# Altium PCB zulu_a7.PcbDoc (part 2 of 3)
Units mm, origin at the board's own origin, x right, y up, seen from the top; angles counter-clockwise.
Board outline 69.85 x 25.4 mm, 6 copper layers (Top Layer, L2-GND, L3-SIG, L4-SIG, L5-VCC3V3, Bottom Layer), stack 1.65 mm thick; 178 components, 177 nets, 839 pads, 377 vias.
Unrouted connection lines stored in the file: 262.
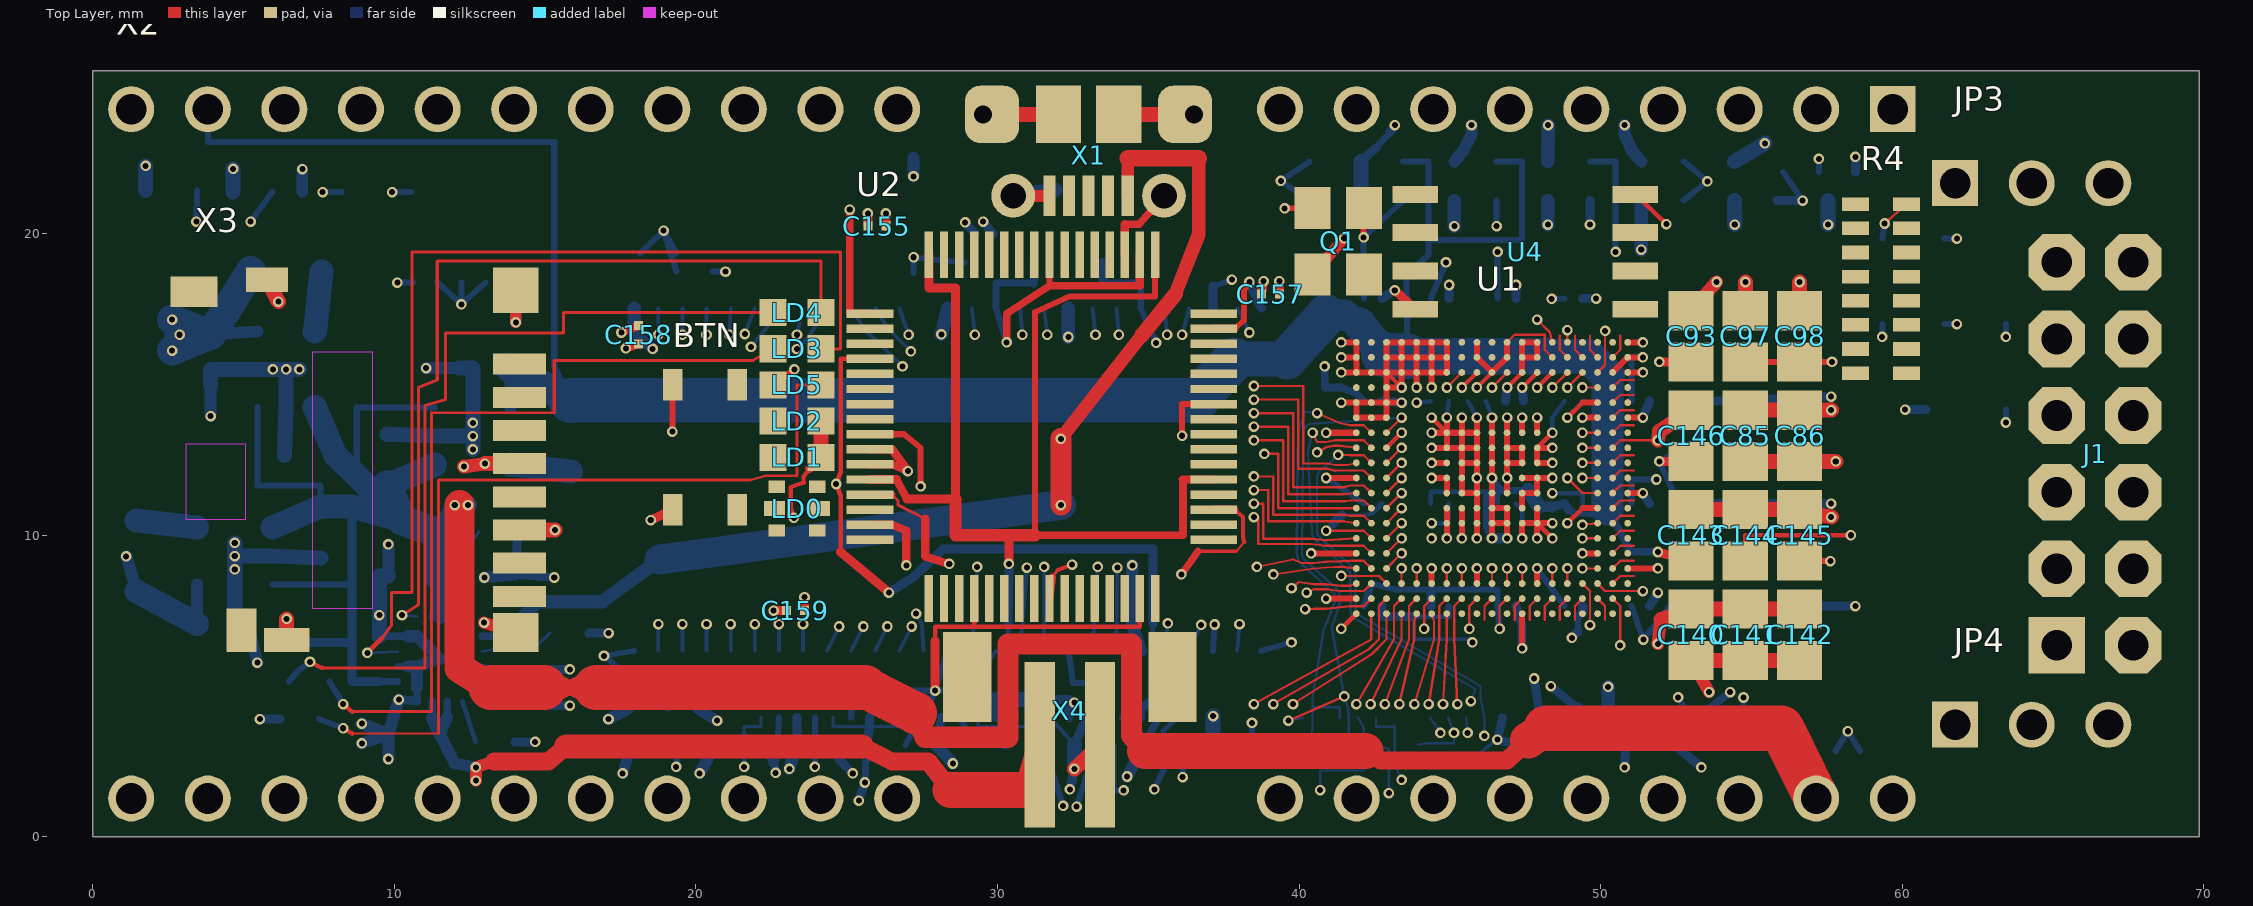
[diagram p0: Top Layer view]

## Part data (continued)
R18 R21 R78 R80 R81 R82 R83 R84 R85 R86 R102 R103 R104 R105 R106 R107 R108: library part R-US_SMALLR0402, "RESISTOR, Ame (continued)
  R81: MANF#=RC0402FR-07330RL, NOTE="RGB LED balance. The green and blue dice are 3.3 V-class parts on a 3.3 V rail, so the resistor never dominates their current -- that is structural and no resistor value fixes it. What the values CAN do is stop red swamping the other two. As built, and as Cmod A7 ships the same LED, 182/182/100 gave red 6.9 mA against green 1.9 and blue 1.5: red about four times either. At 330/33/33 it is red 3.8, green 2.9, blue 2.9. Worst case improves too, not just nominal -- green with a part 0.15 V high in Vf goes from 1.4 mA to 1.8. Lower resistors do make the current MORE sensitive in percentage terms, 77 percent of nominal retained at 100R against 61 at 33R, but the absolute floor is what you see and it rises. Currents read off the datasheet's own Vf/If curve at the working point, not off the 20 mA table.", SPEC="thick film +-1%, 1/16W, 0402"
  R83 R84: MANF#=RC0402FR-07330RL, SPEC="thick film +-1%, 1/16W, 0402"
  R85 R86: MANF#=RC0402FR-0710KL, SPEC="thick film +-1%, 1/16W, 0402"
  R102: MANF#=RC0402FR-073K57L, SPEC="thick film +-1%, 1/16W, 0402 -- ISET: 870 / 3.57k = 244 mA fast-charge current"
  R103: MANF#=RC0402FR-073K09L, SPEC="thick film +-1%, 1/16W, 0402 -- ILIM: 1530 / 3.09k = 495 mA input current limit (EN2 = VU, EN1 = GND select the resistor)"
  R104: MANF#=RC0402FR-0756K2L, SPEC="thick film +-1%, 1/16W, 0402 -- TMR: 10 x 56.2k x 48 s/k = 7.5 h fast-charge and 45 min precharge safety timers"
  R105: MANF#=RC0402FR-074K32L, SPEC="thick film +-1%, 1/16W, 0402 -- ITERM: 0.03 A x 4.32k / 3.57k = 36 mA termination (15 % of the charge current)"
  R106: MANF#=RC0402FR-0710KL, SPEC="thick film +-1%, 1/16W, 0402 -- TS: fixed 10k disables the pack-temperature check (2-pin pack, no NTC); the pack must carry its own protection"
  R107: MANF#=RC0402FR-071K5L, SPEC="thick film +-1%, 1/16W, 0402 -- PGOOD LED current: (4.4 - 2.1) / 1.5k = 1.5 mA"
  R108: MANF#=RC0402FR-071K5L, SPEC="thick film +-1%, 1/16W, 0402 -- CHG LED current: (4.4 - 2.0) / 1.5k = 1.6 mA"
R19 R20 R22 R23 R24 R25 R26 R27 R28 R29 R30 R31 R32 R33 R90 R91 R92 R93 R94 R96 R97 R98 R99 R101: library part R-US_SMALLR0201, "RESISTOR, American symbol, small 2-zigzag variant (sheet 2 only)", DeviceName=R0201, DeviceSetName=R-US_SMALL, GateName_1=G$1, LibraryName=rcl, MANF=Yageo, SPEC="thick film +-1%, 1/20W, 0201", SymbolName_1=R-US_SMALL
  R19 R90 R91 R92 R93 R94 R96 R97 R98: MANF#=RC0201FR-0710KL
  R20 R22 R23: MANF#=RC0201FR-071KL
  R24 R25: MANF#=RC0201FR-0733RL
  R26 R27 R28 R29 R30 R31 R32 R33: MANF#=RC0201FR-07200RL
  R99: MANF#=RC0201FR-074K7L
  R101: MANF#=RC0201FR-072K21L
R34: library part RES4742, "Resistor 4-pack   Package of four resistors.", DeviceName=742, DeviceSetName=RES4, DIGIKEY#=742C083???JPCT-ND, GateName_1=A, GateName_2=B, GateName_3=C, GateName_4=D, LibraryName=ctambe, MANF=CTS, MANF#=742C083472JP, MOUSER#=774-742C083???JP, NOTE="The microSD DAT0-3 pull-ups, all four elements used -- which is what an array is actually for. R1, R2 and R4 used 2, 3 and 6 of theirs in the EAGLE original and were split into discretes during the import; on 2026-09-09 R1 and R4 went back into arrays of their own (742C043472JP and 742C163101JP), so all three arrays on this board are CTS 74x concave parts sharing one land-pattern rule. R2 is still a discrete. 4.7k is the conventional value for SD data lines and it was already chosen; only the part number was missing. 5 percent is ample for a pull-up, so this is a J part where the discrete resistors on this board are F. CTS 742C is the family the footprint is named after. Confirm the suffix -- it encodes tolerance and packaging and is the easy thing to get wrong.", SPEC="4x4.7K isolated array 0603x4, 0.8 mm pitch; direct successor of the obsolete JTR", SymbolName_1=R1NV0, SymbolName_2=R1NV0, SymbolName_3=R1NV0, SymbolName_4=R1NV0
R35: library part R-US_R0402, "RESISTOR, American symbol", DeviceName=R0402, DeviceSetName=R-US_, GateName_1=G$1, LibraryName=rcl, MANF=Yageo, MANF#=RC0402FR-074K7L, SPEC="thick film +-1%, 1/16W, 0402", SymbolName_1=R-US
U1: library part XC7A35T-CPG236-1CPG236C, "Xilinx Artix-7 XC7A35T-1CPG236C   Replacement for the Spartan-6 XC6SLX25-FT256. See design notes: SDRAM/microSD/GPIO ball assignments verified against Digilent Cmod A7-35T (same device+package); config/JTAG/power ball assignments are functionally correct placeholders pending verification against the official Xilinx pinout file.", POWER=POWER, BANK216="BANK 216", DeviceName=-1CPG236C, DeviceSetName=XC7A35T-CPG236, GATE=SDRAM_A0, GateName_1=PWR, GateName_2=GND, GateName_3=BANK216, GateName_4=PART_VALUE, GateName_5=SDRAM_A0, GateName_6=SDRAM_A1, GateName_7=SDRAM_A2, GateName_8=SDRAM_A3, GateName_9=SDRAM_A4, GateName_10=SDRAM_A5, GateName_11=SDRAM_A6, GateName_12=SDRAM_A7, GateName_13=SDRAM_A8, GateName_14=SDRAM_A9, GateName_15=SDRAM_A10, GateName_16=SDRAM_A11, GateName_17=SDRAM_A12, GateName_18=SDRAM_BA0, GateName_19=SDRAM_BA1, GateName_20=SDRAM_CAS#, GateName_21=SDRAM_RAS#, GateName_22=SDRAM_WE#, GateName_23=SDRAM_CS#, GateName_24=SDRAM_CKE, GateName_25=SDRAM_CLK, GateName_26=SDRAM_LDQM, GateName_27=SDRAM_UDQM, GateName_28=SDRAM_DQ0, GateName_29=SDRAM_DQ1, GateName_30=SDRAM_DQ2, GateName_31=SDRAM_DQ3, GateName_32=SDRAM_DQ4, GateName_33=SDRAM_DQ5, GateName_34=SDRAM_DQ6, GateName_35=SDRAM_DQ7, GateName_36=SDRAM_DQ8, GateName_37=SDRAM_DQ9, GateName_38=SDRAM_DQ10, GateName_39=SDRAM_DQ11, GateName_40=SDRAM_DQ12, GateName_41=SDRAM_DQ13, GateName_42=SDRAM_DQ14, GateName_43=SDRAM_DQ15, GateName_44=SPI_SPI_CCLK, GateName_45=SPI_D00_MOSI, GateName_46=SPI_D01_DIN, GateName_47=SPI_FCS_B, GateName_48=SD_DAT3, GateName_49=SD_DAT2, GateName_50=SD_DAT1, GateName_51=CHAN0, GateName_52=CHAN1, GateName_53=CHAN2, GateName_54=CHAN3, GateName_55=CHAN4, GateName_56=CHAN5, GateName_57=CHAN6, GateName_58=CHAN7, GateName_59=CHAN8, GateName_60=CHAN9, GateName_61=CHAN10, GateName_62=CHAN11, GateName_63=IO_W7, GateName_64=CHAN12, GateName_65=CHAN13, GateName_66=CHAN14, GateName_67=CHAN15, GateName_68=CHAN16, GateName_69=CHAN17, GateName_70=CHAN18, GateName_71=CHAN19, GateName_72=CHAN20, GateName_73=CHAN21, GateName_74=CHAN22, GateName_75=CHAN23, GateName_76=CHAN24, GateName_77=CHAN25, GateName_78=CHAN26, GateName_79=CHAN27, GateName_80=UART_CTS, GateName_81=CHAN-CLK, GateName_82=XADC_P, GateName_83=USB_PWREN, GateName_84=XADC_N, GateName_85=CLK12M, GateName_86=UART_TXD, GateName_87=UART_RXD, GateName_88=PROGRAM_B, GateName_89=INIT_B, GateName_90=DONE, GateName_91=TCK, GateName_92=TMS, GateName_93=TDI, GateName_94=TDO, GateName_95=M0, GateName_96=M1, GateName_97=M2, GateName_98=CFGBVS, GateName_99=PUDC_B, GateName_100=MGTPRXP0, GateName_101=MGTPRXN0, GateName_102=MGTPRXP1, GateName_103=MGTPRXN1, GateName_104=GNDADC, GateName_105=VCCADC, GateName_106=VP, GateName_107=VN, GateName_108=VREFP, GateName_109=VREFN, GateName_110=DXP, GateName_111=DXN, GateName_112=MGTPTXP0, GateName_113=MGTPTXN0, GateName_114=MGTPTXP1, GateName_115=MGTREFCLK0P, GateName_116=MGTREFCLK0N, GateName_117=MGTREFCLK1P, GateName_118=MGTREFCLK1N, GateName_119=MGTPTXN1, GateName_120=CHAN28, GateName_121=LED2, GateName_122=LED0_R, GateName_123=IO_A14, GateName_124=IO_A15, GateName_125=IO_A16, GateName_126=LED1, GateName_127=BTN, GateName_128=SD_DAT0, GateName_129=LED0_G, GateName_130=IO_W19, GateName_131=LED0_B, GateName_132=IO_C15, GateName_133=IO_B15, GateName_134=SD_CLK, GateName_135=UART_RTS, GateName_136=IO_N2, GateName_137=SD_CMD, GateName_138=UART_DTR, GateName_139=SPI_D03, GateName_140=SPI_D02, GateName_141=XADC1_P, GateName_142=XADC1_N, GND=GND, LibraryName=ctambe, MANF=AMD/Xilinx, MANF#=XC7A35T-1CPG236C, PART=U1, SymbolName_1=A7_PWR, SymbolName_2=A7_GND, SymbolName_3=A7_BANK216, SymbolName_4=PV_GATE, SymbolName_5=PIN_GATE_IO, SymbolName_6=PIN_GATE_IO, SymbolName_7=PIN_GATE_IO, SymbolName_8=PIN_GATE_IO, SymbolName_9=PIN_GATE_IO, SymbolName_10=PIN_GATE_IO, SymbolName_11=PIN_GATE_IO, SymbolName_12=PIN_GATE_IO, SymbolName_13=PIN_GATE_IO, SymbolName_14=PIN_GATE_IO, SymbolName_15=PIN_GATE_IO, SymbolName_16=PIN_GATE_IO, SymbolName_17=PIN_GATE_IO, SymbolName_18=PIN_GATE_IO, SymbolName_19=PIN_GATE_IO, SymbolName_20=PIN_GATE_IO, SymbolName_21=PIN_GATE_IO, SymbolName_22=PIN_GATE_IO, SymbolName_23=PIN_GATE_IO, SymbolName_24=PIN_GATE_IO, SymbolName_25=PIN_GATE_IO, SymbolName_26=PIN_GATE_IO, SymbolName_27=PIN_GATE_IO, SymbolName_28=PIN_GATE_IO, SymbolName_29=PIN_GATE_IO, SymbolName_30=PIN_GATE_IO, SymbolName_31=PIN_GATE_IO, SymbolName_32=PIN_GATE_IO, SymbolName_33=PIN_GATE_IO, SymbolName_34=PIN_GATE_IO, SymbolName_35=PIN_GATE_IO, SymbolName_36=PIN_GATE_IO, SymbolName_37=PIN_GATE_IO, SymbolName_38=PIN_GATE_IO, SymbolName_39=PIN_GATE_IO, SymbolName_40=PIN_GATE_IO, SymbolName_41=PIN_GATE_IO, SymbolName_42=PIN_GATE_IO, SymbolName_43=PIN_GATE_IO, SymbolName_44=PIN_GATE_IO, SymbolName_45=PIN_GATE_IO, SymbolName_46=PIN_GATE_IO, SymbolName_47=PIN_GATE_IO, SymbolName_48=PIN_GATE_IO, SymbolName_49=PIN_GATE_IO, SymbolName_50=PIN_GATE_IO, SymbolName_51=PIN_GATE_IO, SymbolName_52=PIN_GATE_IO, SymbolName_53=PIN_GATE_IO, SymbolName_54=PIN_GATE_IO, SymbolName_55=PIN_GATE_IO, SymbolName_56=PIN_GATE_IO, SymbolName_57=PIN_GATE_IO, SymbolName_58=PIN_GATE_IO, SymbolName_59=PIN_GATE_IO, SymbolName_60=PIN_GATE_IO, SymbolName_61=PIN_GATE_IO, SymbolName_62=PIN_GATE_IO, SymbolName_63=PIN_GATE_IO, SymbolName_64=PIN_GATE_IO, SymbolName_65=PIN_GATE_IO, SymbolName_66=PIN_GATE_IO, SymbolName_67=PIN_GATE_IO, SymbolName_68=PIN_GATE_IO, SymbolName_69=PIN_GATE_IO, SymbolName_70=PIN_GATE_IO, SymbolName_71=PIN_GATE_IO, SymbolName_72=PIN_GATE_IO, SymbolName_73=PIN_GATE_IO, SymbolName_74=PIN_GATE_IO, SymbolName_75=PIN_GATE_IO, SymbolName_76=PIN_GATE_IO, SymbolName_77=PIN_GATE_IO, SymbolName_78=PIN_GATE_IO, SymbolName_79=PIN_GATE_IO, SymbolName_80=PIN_GATE_OUT, SymbolName_81=PIN_GATE_IO, SymbolName_82=PIN_GATE_IN, SymbolName_83=PIN_GATE_IN, SymbolName_84=PIN_GATE_IN, SymbolName_85=PIN_GATE_IN, SymbolName_86=PIN_GATE_IO, SymbolName_87=PIN_GATE_IO, SymbolName_88=PIN_GATE_IN, SymbolName_89=PIN_GATE_IN, SymbolName_90=PIN_GATE_IN, SymbolName_91=PIN_GATE_IN, SymbolName_92=PIN_GATE_IN, SymbolName_93=PIN_GATE_IN, SymbolName_94=PIN_GATE_IN, SymbolName_95=PIN_GATE_IN, SymbolName_96=PIN_GATE_IN, SymbolName_97=PIN_GATE_IN, SymbolName_98=PIN_GATE_IN, SymbolName_99=PIN_GATE_IN, SymbolName_100=PIN_GATE_IN, SymbolName_101=PIN_GATE_IN, SymbolName_102=PIN_GATE_IN, SymbolName_103=PIN_GATE_IN, SymbolName_104=PIN_GATE_IN, SymbolName_105=PIN_GATE_IN, SymbolName_106=PIN_GATE_IN, SymbolName_107=PIN_GATE_IN, SymbolName_108=PIN_GATE_IN, SymbolName_109=PIN_GATE_IN, SymbolName_110=PIN_GATE_IN, SymbolName_111=PIN_GATE_IN, SymbolName_112=PIN_GATE_IN, SymbolName_113=PIN_GATE_IN, SymbolName_114=PIN_GATE_IN, SymbolName_115=PIN_GATE_IN, SymbolName_116=PIN_GATE_IN, SymbolName_117=PIN_GATE_IN, SymbolName_118=PIN_GATE_IN, SymbolName_119=PIN_GATE_IN, SymbolName_120=PIN_GATE_IN, SymbolName_121=PIN_GATE_IN, SymbolName_122=PIN_GATE_IN, SymbolName_123=PIN_GATE_IN, SymbolName_124=PIN_GATE_IN, SymbolName_125=PIN_GATE_IN, SymbolName_126=PIN_GATE_IN, SymbolName_127=PIN_GATE_IN, SymbolName_128=PIN_GATE_IO, SymbolName_129=PIN_GATE_IN, SymbolName_130=PIN_GATE_IN, SymbolName_131=PIN_GATE_IN, SymbolName_132=PIN_GATE_IN, SymbolName_133=PIN_GATE_IN, SymbolName_134=PIN_GATE_IO, SymbolName_135=PIN_GATE_IN, SymbolName_136=PIN_GATE_IN, SymbolName_137=PIN_GATE_IO, SymbolName_138=PIN_GATE_IN, SymbolName_139=PIN_GATE_IO, SymbolName_140=PIN_GATE_IO, SymbolName_141=PIN_GATE_IN, SymbolName_142=PIN_GATE_IN
U2: library part FT2232HQ-QFN64, "FTDI FT2232HL Dual USB-UART/MPSSE Bridge, LQFP-64. Channel A = MPSSE JTAG to the FPGA (ADBUS0-3 = TCK/TDI/TDO/TMS, ADBUS4/5 = PROG#/DONE). Channel B = UART (BDBUS0-4 = TXD/RXD/RTS#/CTS#/DTR#). Same pin numbering as the FT2232HQ, no exposed pad. Replaced the FT2232HQ on 2026-09-09.", DeviceName=-LQFP64, DeviceSetName=FT2232HL, FT2232HL=FT2232HL, GateName_1=G$1, LibraryName=ctambe, MANF=FTDI, MANF#=FT2232HL-REEL, NOTE="FT2232HL-REEL: Digi-Key 0 with 1,000 expected 19-Feb-2027 ($5.30, 50-week lead); LCSC C27882 4,767 in stock at $11.45 (not an FTDI-authorized channel: name it explicitly or consign for a PCBWay build). Pin numbers unchanged from the FT2232HQ; the QFN exposed pad (pin EP, GND) has no LQFP counterpart, so that pin and its ground stub were removed. thetaJA 37.66 C/W for the LQFP vs 29.67 for the QFN (DS_FT2232H Table 5.7). Footprint FT2232HL-LQFP64 to be drawn from Figure 8.2 or FTDI TN_166. Alternates on the same pin numbers: FT2232HQ (QFN-64) and FT4232HL / FT4232HQ (UART lands on channel C, EEPROM re-templated, PID 0x6011); the FT2232H-56Q keeps every signal but renumbers every pin.", SPEC="USB 2.0 Hi-Speed dual-channel UART/FIFO/MPSSE bridge, LQFP-64 10 x 10 mm body, 12 x 12 mm over leads, 0.5 mm pitch, JEDEC MS-026 BCD, no exposed pad; same die and pin numbering as the FT2232HQ (DS_FT2232H v2.10 section 3.1); channel A MPSSE JTAG + PROG#/DONE, channel B UART; 12 MHz CMOS oscillator into OSCI, internal 1.8 V regulator, 93LC46B EEPROM, REF 12 k; replaced the FT2232HQ (0 stock until April 2027) on 2026-09-09", SymbolName_1=FT2232HQ-BOX
U3: library part SDRAM-X16-ALLIANCE-512M, "SDR SDRAM, x16, 54-pin TSOP-II   The 54-pin TSOP-II x16 SDR pinout is identical for 256Mb and 512Mb: both use row A0-A12 with banks BA0/BA1, and pin 40 is NC on both. They differ only in the column address width -- A0-A8 (512 columns) at 256Mb, A0-A9 (1024 columns) at 512Mb -- which is a memory-controller setting, not a wiring change.", DeviceName=-ALLIANCE-512M, DeviceSetName=SDRAM-X16, GATE=VDD@3, GateName_1=PART_VALUE, GateName_2=VDD@3, GateName_3=DQ0, GateName_4=VDDQ@3, GateName_5=DQ1, GateName_6=DQ2, GateName_7=VSSQ@3, GateName_8=DQ3, GateName_9=DQ4, GateName_10=VDDQ@2, GateName_11=DQ5, GateName_12=DQ6, GateName_13=VSSQ@2, GateName_14=DQ7, GateName_15=VDD@2, GateName_16=LDQM, GateName_17=WE#, GateName_18=CAS#, GateName_19=RAS#, GateName_20=CS#, GateName_21=BA0, GateName_22=BA1, GateName_23=A10, GateName_24=A0, GateName_25=A1, GateName_26=A2, GateName_27=A3, GateName_28=VDD@1, GateName_29=VSS@1, GateName_30=A4, GateName_31=A5, GateName_32=A6, GateName_33=A7, GateName_34=A8, GateName_35=A9, GateName_36=A11, GateName_37=A12, GateName_38=CKE, GateName_39=CLK, GateName_40=UDQM, GateName_41=NC, GateName_42=VSS@2, GateName_43=DQ8, GateName_44=VDDQ@1, GateName_45=DQ9, GateName_46=DQ10, GateName_47=VSSQ@4, GateName_48=DQ11, GateName_49=DQ12, GateName_50=VDDQ@4, GateName_51=DQ13, GateName_52=DQ14, GateName_53=VSSQ@1, GateName_54=DQ15, GateName_55=VSS@3, LibraryName=ctambe, MANF="Alliance Memory", MANF#=AS4C32M16SB-7TCN, NOTE="512Mbit (32M x 16) = 64MB. Pin-for-pin and dimensionally identical to the 256Mb AS4C16M16SA-6TIN it replaces: all 54 pins and every TSOP-II dimension were checked against both datasheets, and pin 40 is NC on both. ONE DIFFERENCE, AND IT IS NOT A PIN -- the column address is A0-A9 (1024 columns) instead of A0-A8 (512). The memory controller must be set to 10 column bits or it reaches only half the array. Row A0-A12, banks BA0/BA1 and refresh (8192 cycles/64ms) are unchanged. IDD1 rises 60mA to 120mA on the 600mA VCC3V3 buck (LTC3569 SW3). 2026-09-08: AS4C32M16SB-6TIN replaced by AS4C32M16SB-7TCN (same B die, 54-TSOP II 400 mil and pinout, datasheet Rev 1.4 Table 2): -7 speed bin, 143 MHz max at CL3 (tCK 7 ns, tAC 5.4 ns), tRCD/tRP 21 ns, tRC/tRFC 63 ns, tRRD/tMRD/tWR 14 ns, tCH/tCL 2.5 ns; 100 MHz at CL2 for every grade. Commercial TA 0..70 C, matching the -1C FPGA. IDD1 max 110 mA (was 120). AS4C32M16SB-7TIN (industrial) is the timing-identical alternate; the -6TIN only if the controller is clocked above 143 MHz.", PART=U3, SymbolName_1=PART_VALUE-SDRAM-X16, SymbolName_2=PL-SDRAM-X16, SymbolName_3=PL-SDRAM-X16, SymbolName_4=PL-SDRAM-X16, SymbolName_5=PL-SDRAM-X16, SymbolName_6=PL-SDRAM-X16, SymbolName_7=PL-SDRAM-X16, SymbolName_8=PL-SDRAM-X16, SymbolName_9=PL-SDRAM-X16, SymbolName_10=PL-SDRAM-X16, SymbolName_11=PL-SDRAM-X16, SymbolName_12=PL-SDRAM-X16, SymbolName_13=PL-SDRAM-X16, SymbolName_14=PL-SDRAM-X16, SymbolName_15=PL-SDRAM-X16, SymbolName_16=PL-SDRAM-X16, SymbolName_17=PL-SDRAM-X16, SymbolName_18=PL-SDRAM-X16, SymbolName_19=PL-SDRAM-X16, SymbolName_20=PL-SDRAM-X16, SymbolName_21=PL-SDRAM-X16, SymbolName_22=PL-SDRAM-X16, SymbolName_23=PL-SDRAM-X16, SymbolName_24=PL-SDRAM-X16, SymbolName_25=PL-SDRAM-X16, SymbolName_26=PL-SDRAM-X16, SymbolName_27=PL-SDRAM-X16, SymbolName_28=PL-SDRAM-X16, SymbolName_29=PL-SDRAM-X16, SymbolName_30=PL-SDRAM-X16, SymbolName_31=PL-SDRAM-X16, SymbolName_32=PL-SDRAM-X16, SymbolName_33=PL-SDRAM-X16, SymbolName_34=PL-SDRAM-X16, SymbolName_35=PL-SDRAM-X16, SymbolName_36=PL-SDRAM-X16, SymbolName_37=PL-SDRAM-X16, SymbolName_38=PL-SDRAM-X16, SymbolName_39=PL-SDRAM-X16, SymbolName_40=PL-SDRAM-X16, SymbolName_41=PL-SDRAM-X16, SymbolName_42=PL-SDRAM-X16, SymbolName_43=PL-SDRAM-X16, SymbolName_44=PL-SDRAM-X16, SymbolName_45=PL-SDRAM-X16, SymbolName_46=PL-SDRAM-X16, SymbolName_47=PL-SDRAM-X16, SymbolName_48=PL-SDRAM-X16, SymbolName_49=PL-SDRAM-X16, SymbolName_50=PL-SDRAM-X16, SymbolName_51=PL-SDRAM-X16, SymbolName_52=PL-SDRAM-X16, SymbolName_53=PL-SDRAM-X16, SymbolName_54=PL-SDRAM-X16, SymbolName_55=PL-SDRAM-X16
U4: library part SPI_FLASH-SOIC_150_208, "SPI Flash", DeviceName=-SOIC_150_208, DeviceSetName=SPI_FLASH, DIGIKEY#=W25Q128JVSIQ-ND, GATE=CS#, GateName_1=PART, GateName_2=CS#, GateName_3=DO, GateName_4=WP#, GateName_5=GND, GateName_6=DI, GateName_7=CLK, GateName_8=HOLD#, GateName_9=VCC, LibraryName=ctambe, MANF=Winbond, MANF#=W25Q128JVSIQ, NOTE="128Mbit quad SPI, SOIC-8 208mil. The XC7A35T bitstream is 17,536,096 bits, so the previous W25Q80BV (8Mbit) could not boot the part at all. 128Mbit leaves ~14MB for user data above the bitstream.", PART=U4, SymbolName_1=PV_GATE, SymbolName_2=PIN_GATE_IN, SymbolName_3=PIN_GATE_OUT, SymbolName_4=PIN_GATE_IN, SymbolName_5=PIN_GATE_IN, SymbolName_6=PIN_GATE_IN, SymbolName_7=PIN_GATE_IN, SymbolName_8=PIN_GATE_IN, SymbolName_9=PIN_GATE_IN
U5: library part SC189-SOT23-5, "1.5A 2.5MHz synchronous buck, fixed output (Semtech SC189)", PartName=SC189Z, MANF=Semtech, MANF#=SC189ZSKTRT
U6: library part SC189-SOT23-5, "1.5A 2.5MHz synchronous buck, fixed output (Semtech SC189)", PartName=SC189L, MANF=Semtech, MANF#=SC189LSKTRT
U7: library part SC189-SOT23-5, "1.5A 2.5MHz synchronous buck, fixed output (Semtech SC189)", PartName=SC189A, MANF=Semtech, MANF#=SC189ASKTRT
U8: library part BQ24232-RGT16, "TI bq24232 single-cell Li-ion charger and power-path manager, 16-pin VQFN 3x3 (RGT) with thermal pad", DeviceName=RGT, DeviceSetName=BQ24232, GateName_1=G$1, LibraryName=ctambe, MANF="Texas Instruments", MANF#=BQ24232RGTR, NOTE="bq24232 (SLUS821J): USB5V0 into IN, OUT onto VU, battery on BAT/X4. With USB present OUT is 4.4 V (LDO) and the input is capped at 495 mA: DPPM trims the charge current first, then the battery supplements the load; the board therefore never draws more than the limit from the port. On battery alone VU = VBAT - 60 mV, and the 3.3 V buck holds regulation down to about 3.45 V. The +5V-INPUT path with D2 and D3 was removed on 2026-09-09, so the charger is the only input. Dissipation about 0.6 W worst case (0.3 W power path at 500 mA plus 0.3 W charging), a 27 C rise at 44.5 C/W. Battery-only start-up into the 40 uF on VU relies on the part's inrush sequence and the 250 mV / 250 us short-circuit detector: scope it on the first board. Footprint VQFN16-3X3-RGT to draw from the datasheet package drawing (3 x 3 mm, 0.5 mm pitch, 1.68 mm pad). Digi-Key 541 in stock at $1.93 on 2026-09-09.", SPEC="single-cell Li-ion/LiPo linear charger with power path, 16-pin VQFN 3 x 3 mm (RGT), IN 4.35-10.2 V with 10.5 V OVP, OUT 4.4 V regulated or VBAT - 60 mV on battery, input limit 495 mA (R103), charge 244 mA (R102), termination 36 mA (R105), 7.5 h timer (R104), TS disabled with 10k (R106), CE and EN1 to GND, EN2 to VU; thetaJA 44.5 C/W; added 2026-09-09 in place of D1", SymbolName_1=BQ24232
U10: library part EEPROM-93LC46B-I/SN, "Microchip 93LC46BT-I/SN, FTDI EEPROM (USB VID/PID/descriptors)   64 x 16 = 1 Kbit. DS_FT2232H p27: \"The EEPROM should be a 16 bit wide configuration such as a Microchip 93LC46B or equivalent capable of a 1 Mbit/s clock rate at VCC = +3.00 V to 3.6 V.\" The B suffix is the fixed x16 organisation, so pins 6 and 7 are both no-connect; only the selectable C variant puts ORG on pin 6.", 93LC46B=93LC46B, DeviceName=-I/SN, DeviceSetName=EEPROM-93LC46B, GateName_1=G$1, LibraryName=ctambe, MANF=Microchip, MANF#=93LC46BT-I/SN, SymbolName_1=EEPROM-93LC46B-BOX
X1: library part MINI-USB-105017-0001, "MINI USB Connector   Source: http://www.hirose.co.jp/cataloge_hp/e24000019.pdf", DeviceName=105017-0001, DeviceSetName=MINI-USB-, GateName_1=G$1, LibraryName=ctambe, MANF=Molex, MANF#=105017-0001, SymbolName_1=MINI-USB
X2: "Zulu A7 Board Connector", DeviceSetName=ZULU-CONN, GATE=CHAN-CLK, GateName_1=CHAN-CLK, GateName_2=CHAN0, GateName_3=CHAN1, GateName_4=CHAN2, GateName_5=CHAN3, GateName_6=CHAN4, GateName_7=CHAN5, GateName_8=CHAN6, GateName_9=CHAN7, GateName_10=CHAN8, GateName_11=CHAN9, GateName_12=CHAN10, GateName_13=CHAN11, GateName_14=+1.8V, GateName_15=+3.3V, GateName_16=GND, GateName_17=+1.0V, GateName_18=RST#, GateName_19=CHAN14, GateName_20=CHAN15, GateName_21=CHAN16, GateName_22=CHAN17, GateName_23=CHAN18, GateName_24=CHAN19, GateName_25=CHAN20, GateName_26=CHAN21, GateName_27=CHAN22, GateName_28=CHAN23, GateName_29=CHAN24, GateName_30=CHAN25, GateName_31=CHAN26, GateName_32=CHAN27, GateName_33=ANALOG-IO0, GateName_34=ANALOG-IO1, GateName_35=CHAN28, GateName_36=G$1, GateName_37=GND2, GateName_38=CHAN12, GateName_39=CHAN13, GateName_40=GND4, GateName_41=VU, LibraryName=ctambe, MANF=Sullins, MANF#="2x PRPC009SAAN-RC + 2x PRPC011SAAN-RC", NOTE="Pin field ZULU-DIP37: 40 pins of 1.016 mm on 2.54 mm pitch, two rows 22.86 mm (0.900 in) apart, numbered 1-40 straight through and skipping both landings. The rows are mirror images: top row pins 1-9 (x 59.69..39.37) = GND, CHAN-CLK, CHAN0..CHAN6, FOUR positions for the micro-USB X1 (36.83..29.21), pins 10-20 (26.67..1.27) = CHAN7..CHAN13, +3.3V, +1.8V, +1.0V, GND, in channel order since 2026-09-09; bottom row pins 21-29 (59.69..39.37), FOUR positions for the LiPo header X4 at the SAME four x values (36.83..29.21), pins 30-40 (26.67..1.27), so X4 sits on the top side directly opposite the edge-mounted USB receptacle. Each landing is 12.70 mm between the neighbouring pin centres, 11.176 mm clear: the JST B2B-PH-SM4-TB body is 7.95 mm, so 1.61 mm each side. Reworked 2026-09-09 from the old 44-position pattern: +5V-INPUT with D2/D3, GND5, GND3 and +3.3V2 removed, CHAN12/CHAN13 moved to pins 2/3, the bottom row closed up, the field renumbered and the landing moved. Three grounds (1, 20, 21); 3.3 V for the header is pin 17 alone; pin 22 VU sources the 4.4 V rail. THE PCB FOOTPRINT MUST BE REDRAWN with 40 pads named 1-40 in these positions -- the imported ZULU-DIP37 still names 44. Sullins PRPC strips fit the holes (0.64 mm square pins, Sullins recommends 1.02 mm). Digi-Key 2026-09-08: PRPC009SAAN-RC 1,201 at $0.18, PRPC011SAAN-RC 428 at $0.22, two of each per board (the 1x11 stock covers about 200 boards). Alternate: any 2.54 mm 1x40 breakaway strip (LCSC Boomele C2337, 81,690) cut to 9 + 11 twice.", PART=X2, SPEC="four 0.1 in male breakaway header strips, 0.64 mm square gold-flash pins, 2.54 mm pitch, through-hole, mounted from the underside, two part numbers and two of each per board: PRPC009SAAN-RC 1x9 twice (pins 1-9 and 21-29) and PRPC011SAAN-RC 1x11 twice (pins 10-20 and 30-40); the two rows are cut identically since the LiPo landing was moved opposite the micro-USB on 2026-09-09", SymbolName_1=PIN_GATE_IO, SymbolName_2=PIN_GATE_IN, SymbolName_3=PIN_GATE_IO, SymbolName_4=PIN_GATE_IO, SymbolName_5=PIN_GATE_IO, SymbolName_6=PIN_GATE_IO, SymbolName_7=PIN_GATE_IO, SymbolName_8=PIN_GATE_IO, SymbolName_9=PIN_GATE_IN, SymbolName_10=PIN_GATE_IO, SymbolName_11=PIN_GATE_IO, SymbolName_12=PIN_GATE_IN, SymbolName_13=PIN_GATE_IO, SymbolName_14=PIN_GATE_IO, SymbolName_15=PIN_GATE_IO, SymbolName_16=PIN_GATE_IO, SymbolName_17=PIN_GATE_IO, SymbolName_18=PIN_GATE_IO, SymbolName_19=PIN_GATE_IO, SymbolName_20=PIN_GATE_IO, SymbolName_21=PIN_GATE_IN, SymbolName_22=PIN_GATE_IO, SymbolName_23=PIN_GATE_IO, SymbolName_24=PIN_GATE_IO, SymbolName_25=PIN_GATE_IO, SymbolName_26=PIN_GATE_IN, SymbolName_27=PIN_GATE_IO, SymbolName_28=PIN_GATE_IO, SymbolName_29=PIN_GATE_IN, SymbolName_30=PIN_GATE_IO, SymbolName_31=PIN_GATE_IO, SymbolName_32=PIN_GATE_IO, SymbolName_33=PIN_GATE_IO, SymbolName_34=PIN_GATE_IO, SymbolName_35=PIN_GATE_IO, SymbolName_36=PV_GATE, SymbolName_37=PIN_GATE_IO, SymbolName_38=PIN_GATE_IO, SymbolName_39=PIN_GATE_IO, SymbolName_40=PIN_GATE_IO, SymbolName_41=PIN_GATE_IO
X3: library part MICROSD_CONDM3D-SF, "microSD socket, push-pull, Hirose DM3D-SF", DeviceName=DM3D-SF, DeviceSetName=MICROSD_CON, GateName_1=G$1, HRS#=609-0025-8, LibraryName=ctambe, MANF=Hirose, MANF#=DM3D-SF, MOUSER#=MOUSER#, SPEC="microSD push-pull (no eject), top mount, 0.5 A; 8 contacts + 4 shell pads G1-G4 + card-detect switch A/B (open without card); DM3 catalog p9", SymbolName_1=MICROSD_CON
X4: library part JST-B2B-PH-SM4-TB, "JST PH 2.0 mm 2-pin top-entry SMT header, LiPo battery input", DeviceName=SM4-TB, DeviceSetName=JST-PH-2, GateName_1=G$1, LibraryName=ctambe, MANF=JST, MANF#=B2B-PH-SM4-TB(LF)(SN), NOTE="B2B-PH-SM4-TB(LF)(SN): 8 mm tall, wire leaves upward; the side-entry twin is S2B-PH-SM4-TB(LF)(SN) (5.5 mm). There is no polarity standard for JST-PH LiPo packs: check pin 1 = + against the pack before plugging in. Footprint JST-B2B-PH-SM4-TB to draw from the catalog page (two contact pads on 2.0 mm plus two 1.6 x 3.0 mm fixing pads). Digi-Key 57,541 in stock at $0.47 on 2026-09-09.", SPEC="JST PH 2.0 mm, 2 circuits, top-entry SMT header with fixing tabs, 2 A, 100 V, -25..85 C, mates with PHR-2 housing; pin 1 = battery +, pin 2 = GND", SymbolName_1=CONN-2
U$2: CC=CC, DeviceSetName=CC_CC, GateName_1=G$1, LibraryName=ctambe, SymbolName_1=CC_CC
U$3: BY=BY, DeviceSetName=CC_BY, GateName_1=G$1, LibraryName=ctambe, SymbolName_1=CC_BY
U$4: DeviceSetName=CC_SA, GateName_1=G$1, LibraryName=ctambe, SA=SA, SymbolName_1=CC_SA
U$5: C=C, DeviceSetName=CC_COPYRIGHT, GateName_1=G$1, LibraryName=ctambe, SymbolName_1=CC_COPYRIGHT

## Via types
v1: diameter 0.35, hole 0.2, Top Layer to Bottom Layer, tented both sides, 377 vias

## Nets (pads, with @x,y where several pads share a name; then routed paths per layer and width w, separated by ;. In a path a pad name is that pad's centre, name@x,y a point inside that pad or via, vN(x,y) a via of type N, cw(c..) or ccw(c..) an arc to the next point about the centre after c; other vN are vias at no path point)
A0: U1.U2 U3.23 | length 24.1
  Top Layer w0.076: v1(40.25,8.1) 40.5,8.21 40.9,8.21 41.35,8.15 41.688,8.15 42.15,8.15 U1.U2@42.4,8.4
  L3-SIG w0.125: v1(21.15,7.05) 21.85,8.425 21.85,8.45 21.875,8.45 27.175,9.75 35.825,9.75 35.9,9.725 37.725,7.9 39.975,7.9 v1(40.25,8.1)
  Bottom Layer w0.125: U3.23@21.15,6.17 v1(21.15,7.05)
A1: U1.T3 U3.24 | length 26.6
  Top Layer w0.076: U1.T3@42.9,8.9 v1(43.4,9.4)
  L3-SIG w0.125: v1(20.35,7.05) 21.05,8.45 21.75,8.675 27.15,10 35.85,10 36,9.95 37.625,8.35 39.25,8.35 40.275,8.95 v1(43.4,9.4)
  Bottom Layer w0.125: U3.24@20.35,6.17 v1(20.35,7.05)
A2: U1.T2 U3.25 | length 25.4
  Top Layer w0.076: v1(38.6,8.95) 39.8,9.2 40.1,9.08 40.5,9.08 40.9,9.12 41.4,9.14 41.688,9.15 42.15,9.15 U1.T2@42.4,8.9
  L4-SIG w0.125: v1(19.55,7.05) 20.25,8.45 29.05,10.5 36.125,10.425 v1(38.6,8.95)
  Bottom Layer w0.125: U3.25@19.55,6.17 v1(19.55,7.05)
A3: U1.T1 U3.26 | length 25.6
  Top Layer w0.076: v1(39.15,8.7) 40.5,8.9 40.9,8.93 41.4,8.96 41.7,8.92 U1.T1@41.9,8.9
  L3-SIG w0.125: v1(18.75,7.05) 19.45,8.45 27.125,10.25 35.875,10.25 36.1,10.175 38.4,8.6 38.7,8.6 v1(39.15,8.7)
  Bottom Layer w0.125: U3.26@18.75,6.17 v1(18.75,7.05)
A4: U1.R3 U3.29 | length 28.6
  Top Layer w0.076: U1.R3@42.9,9.4 v1(43.4,9.9)
  L4-SIG w0.125: v1(18.75,16.65) 19.425,15.3 21.775,13.675 22.325,13.525 36.175,10.725 36.875,10.325 37.675,9.825 39.875,8.85 40,8.775 40.675,8.75 v1(43.4,9.9)
  Bottom Layer w0.125: v1(18.75,16.65) U3.29@18.75,17.53
A5: U1.R2 U3.30 | length 26.5
  Top Layer w0.076: v1(38.5,10.6) 38.646,10.6 38.646,9.71 40.4,9.71 40.9,9.65 41.688,9.65 42.15,9.65 U1.R2@42.4,9.4
  L3-SIG w0.125: v1(19.55,16.65) 20.225,15.3 22.05,13.675 23.125,13.175 v1(38.5,10.6)
  Bottom Layer w0.125: v1(19.55,16.65) U3.30@19.55,17.53
A6: U1.P3 U3.31 | length 27.3
  Top Layer w0.076: U1.P3@42.9,9.9 v1(43.4,10.4)
  L4-SIG w0.125: v1(20.35,16.65) 21.05,15.3 21.875,13.9 22.85,13.65 36.175,11.025 36.275,10.975 36.675,10.75 38.075,9.9 40.025,9.25 40.225,9.05 40.5,9.05 v1(43.4,10.4)
  Bottom Layer w0.125: v1(20.35,16.65) U3.31@20.35,17.53
A7: U1.P1 U3.32 | length 25
  Top Layer w0.076: v1(38.5,11.05) 38.813,11.05 38.813,9.88 40.4,9.88 40.9,9.83 41.4,9.87 U1.P1@41.9,9.9
  L3-SIG w0.125: v1(21.1,16.65) 22.15,13.9 23.225,13.4 v1(38.5,11.05)
  Bottom Layer w0.125: v1(21.1,16.65) U3.32@21.15,17.53
A8: U1.N3 U3.33 | length 26.2
  Top Layer w0.076: U1.N3@42.9,10.4 v1(43.4,10.9)
  L4-SIG w0.125: v1(21.625,16.675) 21.5,16.55 21.475,16.15 22.95,13.875 30.425,12.625 36.275,11.3 38.3,10.075 41,9.8 v1(43.4,10.9)
  Bottom Layer w0.125: v1(21.625,16.675) U3.33@21.95,17.53
A9: U1.N2 U3.34 | length 25.2
  Top Layer w0.076: v1(38.5,11.95) 39.146,11.95 39.146,10.68 40.9,10.68 41.5,10.68 41.688,10.65 42.15,10.65 U1.N2@42.4,10.4
  L3-SIG w0.125: v1(21.825,16.25) 23.225,13.75 23.325,13.625 v1(38.5,11.95)
  Bottom Layer w0.125: v1(21.825,16.25) 22.35,16.9 U3.34@22.75,17.53
A10: U1.U3 U3.22 | length 23.9
  Top Layer w0.076: v1(41.4,8.65) 42.65,8.65 U1.U3@42.9,8.4
  L4-SIG w0.125: v1(21.95,7.05) 22.65,8.45 23.35,8.675 27,9.7 30.9,10.25 36.1,10.175 36.325,10 38.075,8.4 39.25,8.35 39.3,8.375 39.55,8.6 39.85,8.6 40.025,8.475 40.925,8.475 v1(41.4,8.65)
  Bottom Layer w0.125: U3.22@21.95,6.17 v1(21.95,7.05)
A11: U1.N1 U3.35 | length 22.8
  Top Layer w0.076: v1(38.5,11.5) 38.98,11.5 38.98,10.46 40.9,10.46 41.5,10.46 U1.N1@41.9,10.4
  L4-SIG w0.125: v1(23.35,16.65) 23.725,16.3 24.225,13.9 v1(38.5,11.5)
  Bottom Layer w0.125: v1(23.35,16.65) U3.35@23.55,17.53
A12: U1.M3 U3.36 | length 23.9
  Top Layer w0.076: U1.M3@42.9,10.9 v1(43.4,11.4)
  L3-SIG w0.125: v1(23.35,16.175) 25.875,13.875 32.375,13.875 38.7,12.25 39.55,11.4 v1(43.4,11.4)
  Bottom Layer w0.125: v1(23.35,16.175) 23.65,16.475 23.95,16.9 U3.36@24.35,17.53
AIN15_N: C36.1 R13.1 U1.G2 | length 15.4
  Top Layer w0.076: v1(40.6,14.05) 41.35,13.72 41.688,13.65 42.15,13.65 U1.G2@42.4,13.4
  Bottom Layer w0.076: C36.1@40.35,3.05 40.45,3.6 40.45,4.3 ; v1(40.6,14.05) 40.2,14.1 40.007,13.558 39.994,13.523 39.98,13.45 39.979,13.413 39.961,12.768 39.961,12.762 39.961,12.756 39.929,9.404 39.929,9.365 39.941,9.286 39.967,9.211 40.005,9.141 40.054,9.078 40.083,9.052 41.104,8.124 41.123,8.107 41.155,8.066 41.18,8.02 41.196,7.97 41.204,7.918 41.203,7.866 41.192,7.815 41.183,7.791 40.8,6.8 40.45,4.6 40.45,4.3 ; R13.1@41.35,3.95 41.35,4.3 40.45,4.3
AIN15_P: C36.2 R12.1 U1.G3 | length 17.6
  Top Layer w0.076: v1(39.65,3.85) v1(41.5,4.66) ; U1.G3@42.9,13.4 v1(43.4,13.9)
  Bottom Layer w0.076: v1(39.65,3.85) R12.1@40.15,3.95 ; C36.2@41.65,3.05 41.65,4.05 41.62,4.26 v1(41.5,4.66) 41.102,6.846 41.097,6.87 41.096,6.918 41.103,6.967 41.11,6.99 41.35,7.76 41.361,7.797 41.371,7.872 41.37,7.949 41.356,8.024 41.33,8.096 41.292,8.163 41.245,8.223 41.217,8.248 40.196,9.176 40.177,9.193 40.146,9.233 40.121,9.278 40.105,9.327 40.097,9.377 40.097,9.403 40.129,12.755 40.129,12.759 40.129,12.763 40.147,13.408 40.147,13.433 40.157,13.482 40.174,13.529 40.199,13.572 40.231,13.611 40.268,13.644 40.31,13.67 40.356,13.69 40.405,13.701 40.43,13.703 v1(43.4,13.9)
AIN16_N: C37.1 R17.1 U1.J2 | length 19.7
  Top Layer w0.076: v1(41.3,12.665) 41.688,12.65 42.15,12.65 U1.J2@42.4,12.4
  L4-SIG w0.076: v1(42.98,1.45) 43,2.3 45,2.7 v1(46.15,3.35)
  Bottom Layer w0.076: v1(41.3,12.665) 40.698,12.126 40.679,12.109 40.647,12.069 40.622,12.024 40.605,11.976 40.597,11.926 40.597,11.9 40.597,10.15 40.597,10.125 40.605,10.075 40.622,10.027 40.646,9.982 40.677,9.942 40.696,9.925 41.717,8.998 41.746,8.972 41.794,8.91 41.832,8.841 41.858,8.767 41.871,8.69 41.871,8.65 41.872,7.5 41.872,7.489 41.876,7.467 41.883,7.446 41.894,7.427 41.908,7.409 41.926,7.395 41.935,7.389 46.016,5 46.02,4.6 R17.1@46.15,3.95 v1(46.15,3.35) ; C37.1@42.65,3.05 42.98,2.9 v1(42.98,1.45)
AIN16_P: C37.2 R16.1 U1.H2 | length 17.3
  Top Layer w0.076: v1(40.45,13.4) 40.6,13.09 40.9,13.09 41.2,13.15 41.688,13.15 42.15,13.15 U1.H2@42.4,12.9
  L4-SIG w0.076: v1(45.14,3.45) v1(45.7,4.5)
  Bottom Layer w0.076: v1(40.45,13.4) 40.306,12.824 40.3,12.802 40.296,12.757 40.297,12.735 40.43,10.126 40.432,10.089 40.447,10.017 40.473,9.948 40.51,9.884 40.556,9.826 40.584,9.802 41.604,8.875 41.623,8.858 41.654,8.818 41.678,8.773 41.695,8.726 41.703,8.676 41.703,8.65 41.705,7.5 41.705,7.474 41.714,7.424 41.731,7.375 41.757,7.331 41.79,7.292 41.829,7.258 41.851,7.245 45.85,4.9 v1(45.7,4.5) ; C37.2@43.95,3.05 44.25,3.1 45.14,3.1 v1(45.14,3.45) R16.1@44.95,3.95
ANALOG-IO0: R10.2 X2.39
ANALOG-IO1: R14.2 X2.40
BS0: U1.V2 U3.20 | length 21.8
  Top Layer w0.076: v1(40.2,7.55) 40.5,7.56 40.9,7.56 41.688,7.65 42.15,7.65 U1.V2@42.4,7.9
  L3-SIG w0.125: v1(23.55,7.05) 24.25,8.45 27.2,9.5 35.8,9.5 37.9,7.4 39.875,7.4 v1(40.2,7.55)
  Bottom Layer w0.125: U3.20@23.55,6.17 v1(23.55,7.05)
BS1: U1.U1 U3.21 | length 22.1
  Top Layer w0.076: v1(39.75,8.25) 40,8.45 40.5,8.38 40.9,8.38 41.4,8.33 41.7,8.33 U1.U1@41.9,8.4
  L4-SIG w0.125: v1(22.75,7.05) 23.45,8.45 27.2,9.5 31.15,10 36,9.95 36.45,9.575 38.2,7.975 39.525,7.95 v1(39.75,8.25)
  Bottom Layer w0.125: U3.21@22.75,6.17 v1(22.75,7.05)
BTN: R85.2 U1.N17 | length 0.5
  Top Layer w0.076: v1(49.4,10.345) U1.N17@49.9,10.4
CAS#: U1.W3 U3.17 | length 19.9
  Top Layer w0.076: v1(39.8,4.4) 42.4,6.05 42.9,6.55 U1.W3@42.9,7.4
  L4-SIG w0.125: v1(26.35,6.975) 26.35,6.725 27.575,5.5 39.25,4.75 v1(39.8,4.4)
  Bottom Layer w0.125: U3.17@25.95,6.17 v1(26.35,6.975)
CFG-M0: R20.1 U1.V12 | length 0.8
  Top Layer w0.076: 47.15,7.187 47.15,7.65 U1.V12@47.4,7.9
CFG-M1: R21.2 U1.W11
CFG-M2: R22.2 U1.U10 | length 0.5
  Top Layer w0.076: U1.U10@46.4,8.4 v1(46.4,8.9)
CHAN0: U1.B18 X2.3 | length 0.8
  Top Layer w0.076: U1.B18@50.4,15.9 50.65,16.15 50.65,16.612
CHAN1: U1.A18 X2.4
CHAN2: U1.B17 X2.5 | length 0.8
  Top Layer w0.076: 49.65,16.612 49.65,16.15 U1.B17@49.9,15.9
CHAN3: U1.A17 X2.6
CHAN4: U1.C16 X2.7 | length 0.7
  Top Layer w0.076: v1(48.9,14.9) U1.C16@49.4,15.4
CHAN5: U1.D17 X2.8 | length 0.5
  Top Layer w0.076: v1(49.4,14.9) U1.D17@49.9,14.9
CHAN6: U1.H17 X2.9 | length 0.5
  Top Layer w0.076: v1(49.4,12.9) U1.H17@49.9,12.9
CHAN7: U1.H19 X2.10
CHAN8: U1.J18 X2.11 | length 0.8
  Top Layer w0.076: U1.J18@50.4,12.4 50.65,12.65 51.112,12.65
CHAN9: U1.J17 X2.12 | length 0.5
  Top Layer w0.076: v1(49.4,12.4) U1.J17@49.9,12.4
CHAN10: U1.J19 X2.13
CHAN11: U1.K17 X2.14 | length 0.5
  Top Layer w0.076: v1(49.4,11.9) U1.K17@49.9,11.9
CHAN12: U1.W19 X2.15
CHAN13: U1.W18 X2.16
CHAN14: U1.W17 X2.24
CHAN15: U1.V17 X2.25 | length 0.8
  Top Layer w0.076: U1.V17@49.9,7.9 50.15,7.65 50.15,7.187
CHAN16: U1.W16 X2.26
CHAN17: U1.U16 X2.27 | length 1.5
  Top Layer w0.076: U1.U16@49.4,8.4 49.65,8.15 v1(49.65,7.02)
CHAN18: U1.V16 X2.28 | length 0.8
  Top Layer w0.076: 49.15,7.187 49.15,7.65 U1.V16@49.4,7.9
CHAN19: U1.W15 X2.29
CHAN20: U1.V15 X2.30 | length 0.8
  Top Layer w0.076: 48.65,7.187 48.65,7.65 U1.V15@48.9,7.9
CHAN21: U1.U15 X2.31 | length 0.5
  Top Layer w0.076: U1.U15@48.9,8.4 v1(48.9,8.9)
CHAN22: U1.W14 X2.32
CHAN23: U1.V14 X2.33 | length 0.8
  Top Layer w0.076: 48.15,7.187 48.15,7.65 U1.V14@48.4,7.9
CHAN24: U1.U14 X2.34 | length 0.5
  Top Layer w0.076: U1.U14@48.4,8.4 v1(48.4,8.9)
CHAN25: U1.W13 X2.35
CHAN26: U1.V13 X2.36 | length 0.8
  Top Layer w0.076: 47.65,7.187 47.65,7.65 U1.V13@47.9,7.9
CHAN27: U1.T18 X2.37 | length 0.8
  Top Layer w0.076: U1.T18@50.4,8.9 50.65,9.15 51.112,9.15
CHAN28: U1.R19 X2.38
CHAN-CLK: U1.P18 X2.2 | length 0.8
  Top Layer w0.076: U1.P18@50.4,9.9 50.65,10.15 51.112,10.15
CKE: U1.M2 U3.37 | length 20.5
  Top Layer w0.076: v1(38.5,13.15) 39.479,13.15 39.479,11.13 40.9,11.13 41.5,11.13 41.688,11.15 42.15,11.15 U1.M2@42.4,10.9
  L3-SIG w0.125: v1(26.85,15.6) v1(38.5,13.15)
  Bottom Layer w0.125: U3.37@25.15,17.53 25.575,16.85 v1(26.85,15.6)
CLK-12M-FPGA: R25.2 U1.L17 | length 1.2
  Top Layer w0.076: v1(48.9,11.9) 49.4,11.4 U1.L17@49.9,11.4
CLK-12M-FT: R24.2 U2.2
CLK-12M-SHARED: Q1.3 R24.1 R25.1
D0: U1.V8 U3.2 | length 12.4
  Top Layer w0.076: v1(45.25,4.4) 45.15,6.55 45.15,7.187 45.15,7.65 U1.V8@45.4,7.9
  L4-SIG w0.125: v1(38.025,7.05) 39,6.075 41.7,5.75 44.925,4.75 v1(45.25,4.4)
  Bottom Layer w0.125: U3.2@37.95,6.17 v1(38.025,7.05)
D1: U1.V7 U3.4 | length 13
  Top Layer w0.076: v1(44.3,4.4) 44.65,6.55 44.65,7.187 44.65,7.65 U1.V7@44.9,7.9
  L4-SIG w0.125: v1(36.75,7.025) 36.75,6.75 37.475,6.025 41.675,5.5 43.975,4.75 v1(44.3,4.4)
  Bottom Layer w0.125: U3.4@36.35,6.17 v1(36.75,7.025)
D2: U1.W7 U3.5 | length 13.7
  Top Layer w0.076: v1(44.775,4.4) 44.9,6.55 U1.W7@44.9,7.4
  L3-SIG w0.125: v1(35.65,7.075) 36.275,6.425 43.125,5.325 44.45,4.75 v1(44.775,4.4)
  Bottom Layer w0.125: U3.5@35.55,6.17 v1(35.65,7.075)
D3: U1.W6 U3.7 | length 18
  Top Layer w0.076: v1(43.825,4.4) 44.475,6.55 44.475,7.15 U1.W6@44.4,7.4
  L3-SIG w0.125: v1(33.975,8.925) 34.625,6.45 43.1,5.075 v1(43.825,4.4)
  Bottom Layer w0.125: U3.7@33.95,6.17 v1(33.975,8.925)
D4: U1.U5 U3.8 | length 17
  Top Layer w0.076: U1.U5@43.9,8.4 v1(43.9,8.9)
  L4-SIG w0.125: v1(33.325,8.95) 33.325,9.5 33.875,9.5 35.8,9.5 38.175,7.375 38.675,6.9 40.575,6.9 40.975,7.3 43.675,7.3 43.7,7.325 v1(43.9,8.9)
  Bottom Layer w0.125: U3.8@33.15,6.17 v1(33.325,8.95)
D5: U1.W5 U3.10 | length 19.8
  Top Layer w0.076: v1(43.325,4.4) 43.825,6.55 43.825,7.15 U1.W5@43.9,7.4
  L4-SIG w0.125: v1(31.55,8.95) 32.25,6.45 41.65,5.25 43,4.75 v1(43.325,4.4)
  Bottom Layer w0.125: U3.10@31.55,6.17 v1(31.55,8.95)